# Altium PCB v1_pcb.PCBDOC
Units mil, origin at the board's own origin, x right, y up, seen from the top; angles counter-clockwise.
Board outline 3900 x 2500 mil, 2 copper layers (Top Layer, Bottom Layer); 55 components, 32 nets, 159 pads, 3 vias.
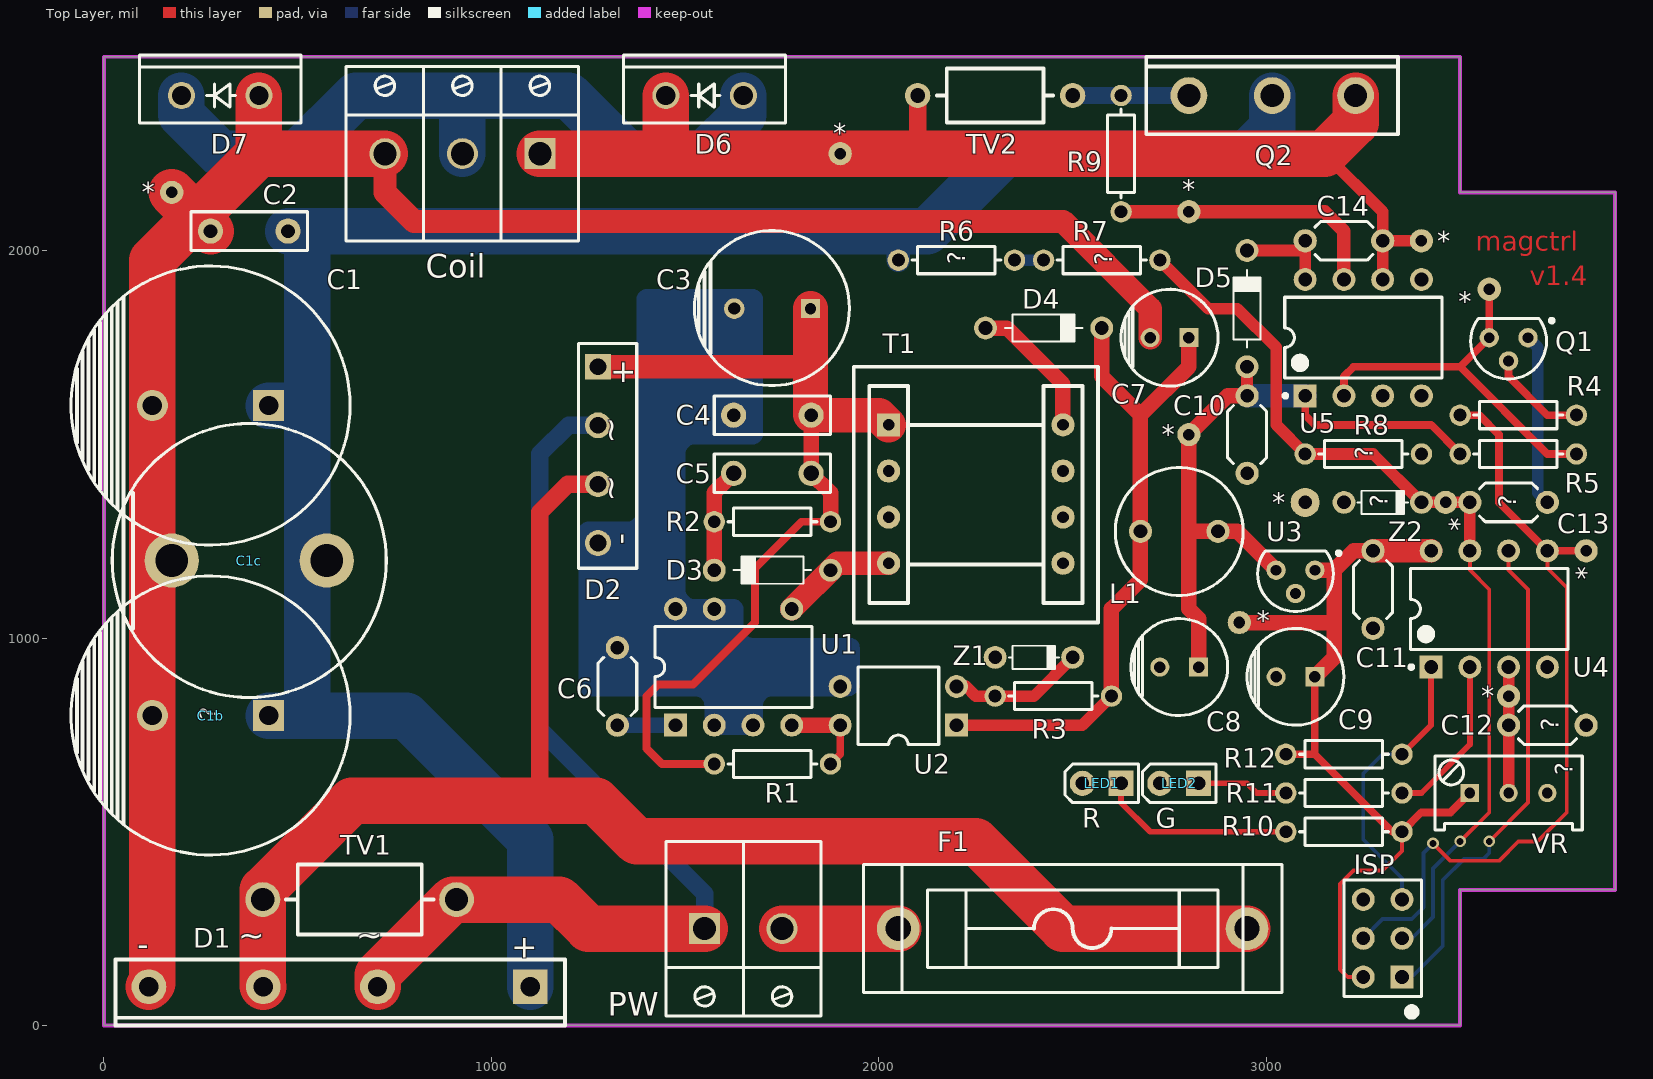
[diagram p0: Top Layer view]
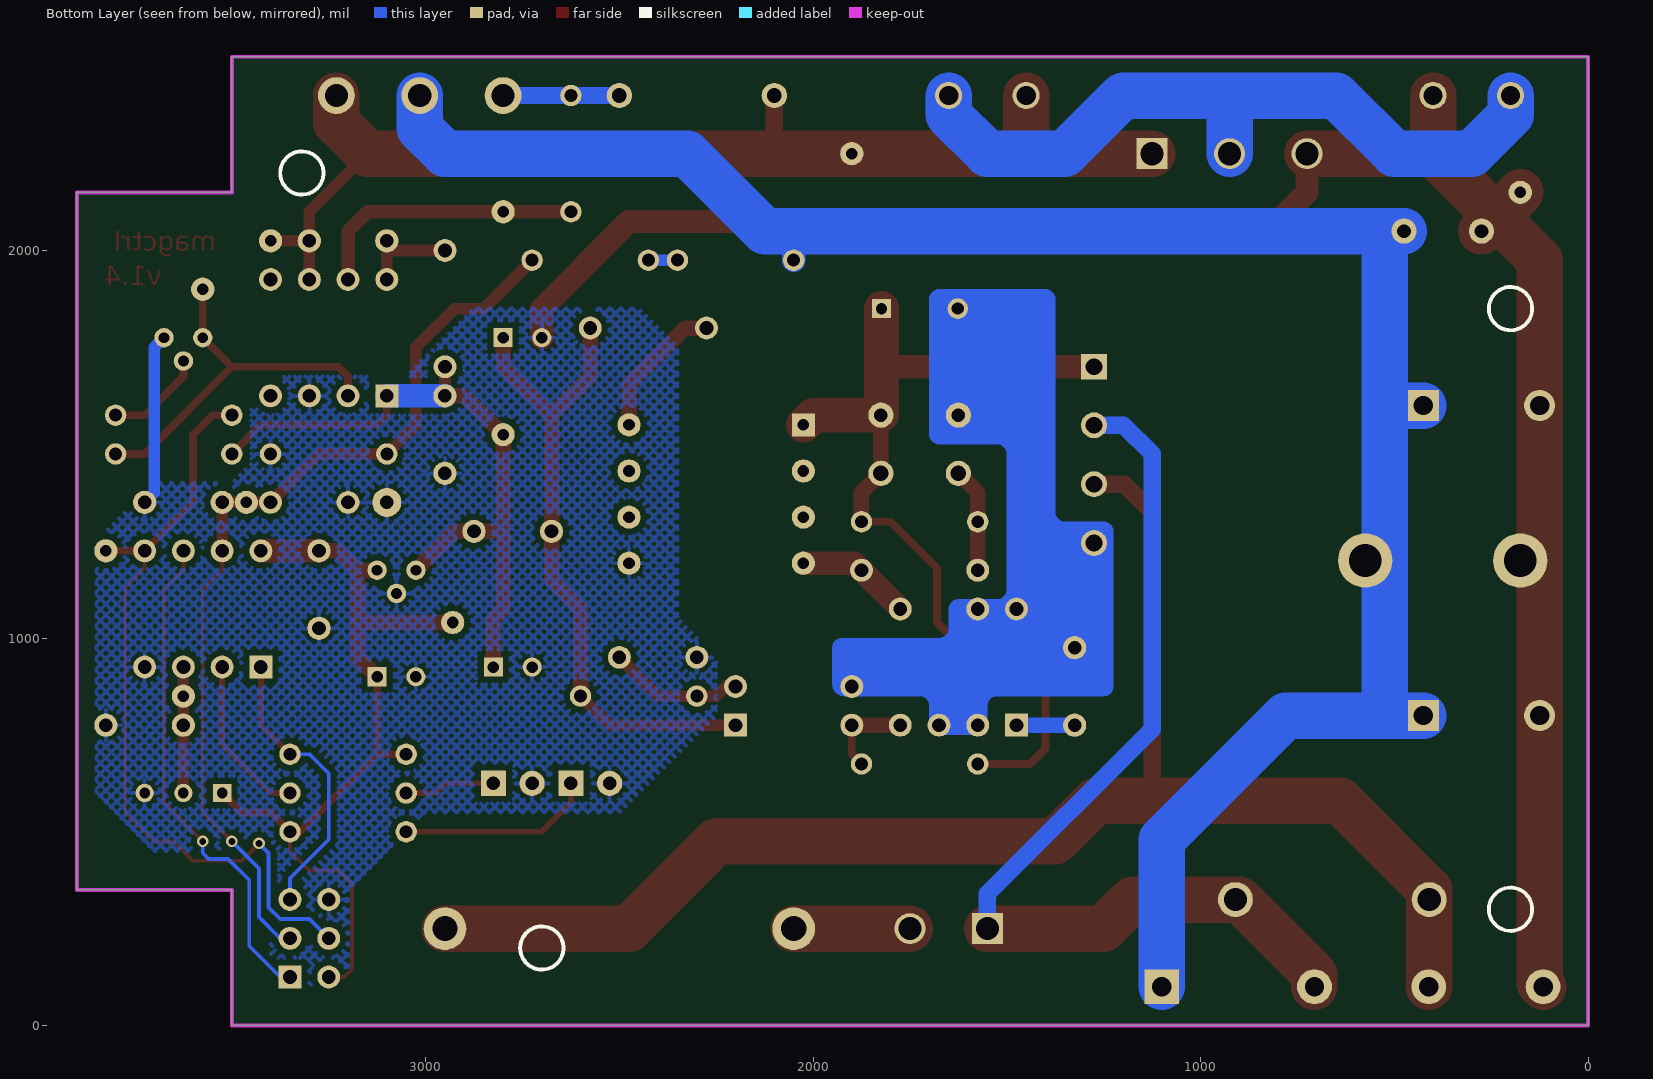
[diagram p1: Bottom Layer view, seen from below]

## Layer stack, top to bottom
Top Layer: signal copper 1.4
Dielectric: dielectric 12.6, FR-4, Dk 4.8
Bottom Layer: signal copper 1.4

## Board outline
0,0 0,2500 3500,2500 3500,2150 3900,2150 3900,350 3500,350 3500,0

## Design rules (kind name [scope] priority, off if disabled: settings)
Clearance Clearance_HV [(InNet('HV+') OR InNet('HV-') OR InNet('HVDC') OR InNet('PW+') OR InNet('PW-')) vs Not (OnLayer('Keep-Out Layer'))] p1: gap=30
Clearance Clearance_Overall [All] p2: gap=15
FabricationTestPointUsage TestPointUsage [All] p1: valid=0 allowmultiple=FALSE
FabricationTestpoint Testpoint [All] p1: side=3 testpointundercomponent=TRUE minsize=40 maxsize=100 preferedsize=60 minholesize=0 maxholesize=40 preferedholesize=32 testpointgrid=1 allowsidetop=TRUE allowsidebottom=TRUE usegrid=TRUE gridtolerance=0.01
Height [All] p1: minheight=0 maxheight=2000 prefheight=500
HoleSize [All] p1: absolutevalues=TRUE maxlimit=1000 minlimit=10 maxpercent=80.000 minpercent=20.000
PolygonConnect [All] p1: connectstyle=Relief reliefconductorwidth=10 reliefentries=4 polygonreliefangle="90 Angle" airgapwidth=10
RoomDefinition v1_control [InComponentClass('v1_control')] p1: confinementstyle=ConfineOut formatcopy=TRUE lockcomponents=FALSE outline 4106,150 4575,150 4575,625 4106,625
RoomDefinition v1_power [InComponentClass('v1_power')] p2: confinementstyle=ConfineOut formatcopy=TRUE lockcomponents=FALSE outline 4106,725 4575,725 4575,1200 4106,1200
RoutingVias [All] p1: holewidth=28 width=50 viastyle="Through Hole" minholewidth=20 minwidth=30 maxholewidth=50 maxwidth=80
SolderMaskExpansion [All] p1: expansion=4
Width [All] p1: maxlimit=150 minlimit=10 preferedwidth=25 minimp=50.000000 maximp=50.000000 favimp=50.000000
24 further rules are at their usual default settings.

## Classes and differential pairs
component class v1_control: C10 C11 C12 C13 C14 Coil Coil1 D5 D6 D7 ISP LED1 LED2 Q1 Q2 R4 R5 R6 R7 R8 R9 R10 R11 R12 TV2 U4 U5 VR Z2
component class v1_power: C1 C1b C1c C2 C3 C4 C5 C6 C7 C8 C9 C88 C? D1 D2 D3 D4 F1 L1 PW R1 R2 R3 T1 TV1 U1 U2 U3 Z1

## Components (designator, comment, footprint, x,y, rotation, side; value= is the part's Value field where it differs from the comment)
C1 "450V100uF" CAP_18X30 275,1600 r180 top
C1b "450V100uF" CAP_18X30 275,800 r180 top
C1c "450V100uF" CAP_10MM_STUB 375,1200 r180 top
C2 "1KV0.01uF" CAP7 375,2050 r180 top
C3 "450V10uF" CAP2 1725,1850 r180 top
C4 "1KV10nF" CAP7 1725,1575 r180 top
C5 "1KV2.2nF" CAP5 1725,1425 r0 top
C6 "100V0.1uF" CAP6 1325,875 r270 top
C7 "50V22uF" CAP3 2750,1775 r180 top
C8 "50V22uF" CAP3 2775,925 r180 top
C9 "50V22uF" CAP3 3075,900 r180 top
C10 "100V0.1uF" CAP6 2950,1525 r270 top
C11 "100V0.1uF" CAP6 3275,1125 r270 top
C12 "1nF" CAP6 3725,775 r0 top
C13 "1nF" CAP6 3625,1350 r0 top
C14 "100V0.1uF" CAP6 3200,2025 r0 top
Coil "Header 3" TERMINAL3_1 925,2250 r180 top
D1 "GBJ2510" GBJ2510 1100,100 r180 top
D2 "KBP310" KBP310 1275,1700 r270 top
D3 "FR107" DIO1 1725,1175 r180 top
D4 "FR107" DIO1 2425,1800 r0 top
D5 "FR107" DIO1 2950,1850 r90 top
D6 "DS130-12A" TO-220_2 1550,2400 r0 top
D7 "DS130-12A" TO-220_2 300,2400 r0 top
F1 "5A" FUSE 2050,250 r0 top
ISP "Header 3X2" HDR2X3 3350,125 r90 top
L1 "4.7uH" INDUCTOR 2775,1275 r0 top
LED1 "R" LED1R 2575,625 r180 top
LED2 "G" LED1G 2775,625 r180 top
PW "Header 2" TERMINAL2_1 1550,250 r0 top
Q1 "9013" TO-92D 3625,1775 r90 top
Q2 "17N80C3" TO-247 3015,2400 r0 top
R1 "2M" RES0.25W 1725,675 r180 top
R2 "100K" RES0.25W 1725,1300 r0 top
R3 "1K" RES0.25W 2450,850 r0 top
R4 "10K" RES0.25W 3650,1575 r180 top
R5 "10K" RES0.25W 3650,1475 r0 top
R6 "200K" RES0.25W 2200,1975 r0 top
R7 "200K" RES0.25W 2575,1975 r0 top
R8 "5K" RES0.25W 3250,1475 r0 top
R9 "10R" RES0.25W 2625,2250 r90 top
R10 "4.7K" RES0.25W 3200,500 r180 top
R11 "4.7K" RES0.25W 3200,600 r180 top
R12 "4.7K" RES0.25W 3200,700 r0 top
T1 "HFTrans" EE16 2025,1550 r0 top
TV1 "1.5KE440CA" TVS1 660,325 r0 top
TV2 "6P18CA" TVS2 2300,2400 r0 top
U1 "TNY266PN" TNY266PN 1475,775 r0 top
U2 "P521-1" DIP-4 2050,825 r90 top
U3 "78L05" TO-92D 3075,1175 r90 top
U4 "TINY13A" DIP-8 3575,1075 r90 top
U5 "IR2117S" DIP-8 3250,1775 r90 top
VR "RPot" 3296W 3625,600 r0 top
Z1 "12V" DIO2 2400,950 r0 top
Z2 "5V" DIO2 3300,1350 r0 top

## Footprints (in the part's own frame and the unit in brackets; to place one, negate y for a bottom-side part, rotate by r counter-clockwise, add the part's x,y. Pads: shape width x height; smd on the part's side, far side on the other; paste and mask are expansions set on the pad)
3296W [mm] "Thru-Hole; 3 Leads"
  rect 1.2x1.2 hole 0.7: 1(-2.54,0)
  round 1.2 hole 0.7: 2(0,0) 3(2.54,0)
  silkscreen extent -4.83,-2.41 4.83,2.41, body extent -4.83,-2.41 4.83,2.41, height 11.94
CAP2 [mm]
  rect 1.25x1.25 hole 0.75: 1(-2.5,0)
  round 1.35 hole 0.8: 2(2.5,0)
  silkscreen extent -5.05,-5.11 5.11,5.05, body extent -4.97,-5.01 5.03,4.98, height 14.1
CAP3 [mm] "Capacitor, Electrolytic, Radial; Body 5 x 6.8 mm (Dia.xH typ); Pin Spacing 2 mm (typ)"
  rect 1.25x1.25 hole 0.75: 1(-1.27,0)
  round 1.25 hole 0.75: 2(1.27,0)
  silkscreen extent -3.18,-3.17 3.17,3.17, body extent -3.18,-3.18 3.18,3.18, height 11.53
CAP5 [mm] "Capacitor, Ceramic, High Voltage"
  round 1.65 hole 1: 1(-2.54,0) 2(2.54,0)
  silkscreen extent -3.81,-1.27 3.81,1.27, body extent -4,-1.26 4,1.25, height 10.6
CAP6 [mil]
  round 60 hole 35: 1(-100,0) 2(100,0)
  silkscreen extent -75,-50 75,50, body extent -108,-50 108,48, height 257
CAP7 [mm]
  round 1.65 hole 0.889: 1(-2.54,0) 2(2.54,0)
  silkscreen extent -3.81,-1.27 3.81,1.27, body extent -4,-1.27 4,1.24, height 10.86
CAP_10MM_STUB [mil]
  round 140 hole 85: 1(-200,0) 2(200,0)
  silkscreen extent -354,-354 354,354, body extent -225,-25 225,25
CAP_18X30 [mil]
  rect 80x80 hole 50: 1(-150,0)
  round 80 hole 50: 2(150,0)
  silkscreen extent -360,-360 360,360, body extent -353,-354 356,354, height 1183
DIO1 [mm]
  round 1.5 hole 0.9: 1(-3.81,0) 2(3.81,0)
  silkscreen extent -2.54,-0.89 2.54,0.89, body extent -4.22,-1.33 4.19,1.33, height 3.06
DIO2 [mm]
  round 1.5 hole 0.9: 1(-2.54,0) 2(2.54,0)
  silkscreen extent -1.65,-0.76 1.65,0.76, body extent -2.74,-0.84 2.77,0.81, height 1.81
DIP-4 [mm] "DIP; 4 Leads; Row Spacing 7.62 mm; Pitch 2.54 mm"
  rect 1.5x1.5 hole 0.9: 1(-1.27,-3.81)
  round 1.5 hole 0.9: 2(1.27,-3.81) 3(1.27,3.81) 4(-1.27,3.81)
  silkscreen extent -2.55,-2.65 2.55,2.65, body extent -2.75,-3.94 2.79,4.06, height 5.58
DIP-8 [mm] "DIP; 8 Leads; Row Spacing 7.62 mm; Pitch 2.54 mm"
  rect 1.5x1.5 hole 0.9: 1(-3.81,3.81)
  round 1.5 hole 0.9: 2(-3.81,1.27) 3(-3.81,-1.27) 4(-3.81,-3.81) 5(3.81,-3.81) 6(3.81,-1.27) 7(3.81,1.27) 8(3.81,3.81)
  silkscreen extent -3.93,-5.15 2.65,5.23, body extent -3.93,-5.33 3.94,5.59, height 5.08
EE16 [mil]
  rect 60x60 hole 30: 1(0,0)
  round 60 hole 30: 2(0,-119) 3(0,-238) 4(0,-357) 5(450,-357) 6(450,-238) 7(450,-119) 8(450,0)
  silkscreen extent -90,-510 540,150, body extent -88,-527 538,170, height 707
FUSE [mil]
  round 110 hole 65: 1(0,0) 2(900,0)
  silkscreen extent -90,-165 990,165, body extent -100,-180 1000,175, height 575
GBJ2510 [mil] "SIP; 4 Leads; Body 15 x 17.5 x 6.8 mm (typ); Pitch 3.8 mm"
  rect 90x90 hole 50: 1(0,0)
  round 90 hole 50: 2(394,0) 3(689,0) 4(984,0)
  silkscreen extent -90,-70 1070,100, body extent -90,-75 1070,110, height 800
HDR2X3 [mm] "Connector; Header; 3x2 Position"
  rect 1.5x1.5 hole 0.9: 1(0,0)
  round 1.5 hole 0.9: 2(0,2.54) 3(2.54,0) 4(2.54,2.54) 5(5.08,0) 6(5.08,2.54)
  silkscreen extent -2.54,-1.27 6.35,3.81, body extent -1.27,-1.27 6.35,3.81, height 8.79
INDUCTOR [mil]
  round 60 hole 35: 1(-100,0) 2(100,0)
  silkscreen extent -165,-165 165,165, body extent -154,-155 154,152, height 400
KBP310 [mm]
  rect 1.7x1.7 hole 1.1: 1(0,0)
  round 1.7 hole 1.1: 2(3.835,0) 3(7.696,0) 4(11.557,0)
  silkscreen extent -1.52,-1.27 13.21,2.54, body extent -2.03,-1.62 13.97,2.38, height 13.54
LED1G [mm]
  rect 1.65x1.65 hole 0.889: 1(-1.27,0)
  round 1.65 hole 0.889: 2(1.27,0)
  silkscreen extent -2.41,-1.27 2.41,1.27, body extent -2,-2 1.52,2, height 6.72
LED1R [mm]
  rect 1.65x1.65 hole 0.889: 1(-1.27,0)
  round 1.65 hole 0.889: 2(1.27,0)
  silkscreen extent -2.41,-1.27 2.41,1.27, body extent -2,-2 1.52,2, height 6.72
RES0.25W [mm] "Resistor; 2 Leads"
  round 1.4 hole 0.85: 1(-3.81,0) 2(3.81,0)
  silkscreen extent -2.92,-0.89 2.92,0.89, body extent -4.06,-0.93 4.06,1.02, height 2.24
TERMINAL2_1 [mil] "Connector; Header; 2 Position"
  rect 80x80 hole 60: 1(0,0)
  round 80 hole 60: 2(200,0)
  silkscreen extent -100,-225 300,225, body extent -120,-237 320,235, height 433
TERMINAL3_1 [mil] "Connector; Header; 2 Position"
  rect 80x80 hole 60: 1(-200,0)
  round 80 hole 60: 2(0,0) 3(200,0)
  silkscreen extent -300,-225 300,225, body extent -320,-237 320,235, height 433
TNY266PN [mm] "DIP; 8 Leads; Row Spacing 7.62 mm; Pitch 2.54 mm"
  rect 1.5x1.5 hole 0.9: 1(0,0)
  round 1.5 hole 0.9: 2(2.54,0) 3(5.08,0) 4(7.62,0) 5(7.62,7.62) 7(2.54,7.62) 8(0,7.62)
  silkscreen extent -1.34,1.16 8.96,6.46, body extent -1.44,-0.19 9.06,7.81, height 3.81
TO-92D [mil]
  round 50 hole 28: 1(0,-50) 2(-60,0) 3(0,50)
  silkscreen extent -107,-116 50,98, body extent -94,-94 60,94, height 315
TO-220_2 [mil] "TO, Thru-Hole, Vertical, Heatsink Mounted; 3 In-Line Leads (1 Absent); Pitch 2.54 mm"
  round 70 hole 50: 1(100,0) 2(-100,0)
  silkscreen extent -209,-71 209,105, body extent -197,-67 197,110, height 830
TO-247 [mil]
  round 95 hole 60: 1(-215,0) 2(0,0) 3(215,0)
  silkscreen extent -325,-100 325,100, body extent -311,-94 311,115, height 1044
TVS1 [mil]
  round 90 hole 60: 1(-250,0) 2(250,0)
  silkscreen extent -190,-90 190,90, body extent -321,-104 321,104, height 254
TVS2 [mil]
  round 65 hole 38: 1(-200,0) 2(200,0)
  silkscreen extent -150,-70 150,70, body extent -267,-70 267,70, height 184

## Part data
C1 C1b C1c C3 C7 C8 C9: library part "Cap Pol2", "Polarized Capacitor (Axial)"
C2 C4 C5 C6 C10 C11 C12 C13 C14: library part Cap, "Capacitor"
Coil: "Header, 3-Pin"
D1 D2: "Single Phase Rectifier Bridge"
D3 D4 D5: library part Diode, "1 Amp Fast Recovery Rectifier"
D6 D7: library part Diode, "Diode"
F1: library part "Fuse 2", "Fuse"
ISP: "Header, 3-Pin, Dual row"
L1: library part Inductor, "Inductor"
LED1 LED2: library part LED, "LED"
PW: "Header, 2-Pin"
Q1: "NPN Bipolar Transistor"
Q2: "MOSFET N"
R1 R2 R3 R4 R5 R6 R7 R8 R9 R10 R11 R12: library part Res1, "Resistor"
T1: "Transformer"
TV1 TV2: library part TVS, "TVS Diode"
U1: "PI TinySwitch II"
U2: library part Optoisolator1, "4-Pin Phototransistor Optocoupler"
U3: "Positive Voltage Regulator"
U4: "AVR MCU"
U5: "MOSFET Driver"
VR: "Potentiometer"
Z1 Z2: library part "D Zener", "Zener Diode"

## Free pads (board coordinates)
  round 60 hole 30: 0(175,2150) 0(1900,2250) 0(2800,1525) 0(2800,2100) 0(2930,1040) 0(3400,2025) 0(3462.5,1350) 0(3575,1900) 0(3625,850) 0(3825,1225)
  round 75 hole 35: 0(3100,1350)

## Via types
v1: diameter 30, hole 18, Top Layer to Bottom Layer, 3 vias

## Nets (pads, with @x,y where several pads share a name; then routed paths per layer and width w, separated by ;. In a path a pad name is that pad's centre, name@x,y a point inside that pad or via, vN(x,y) a via of type N, cw(c..) or ccw(c..) an arc to the next point about the centre after c; other vN are vias at no path point)
5V: C9.1 C11.1 ISP.2 pad.0@2930,1040 R10.1 R12.1 U3.1 U4.8 VR.1 | length 2194.2
  Top Layer w10: ISP.2 3210,125 3190,145 3190,365 3225,400 3300,400 3350,450 R10.1
  Top Layer w20: R12.1 3125,700 ; C9.1 3125,700 ; VR.1 3475,550 3400,550 R10.1 3325,500 3125,700
  Top Layer w40: pad.0@2930,1040 3175,1040 ; C9.1 3175,950 3175,1040 ; U3.1 3175,1175 ; C11.1 3225,1225 3175,1175 ; 3175,1040 3175,1175
  Top Layer w60: C11.1 U4.8
13V: C8.1 C10.1 D5.1 L1.2 pad.0@2800,1525 R5.1 U3.3 U5.1 | length 1784.6
  Top Layer w20: U5.1 3100,1575 3125,1550 3425,1550 R5.1
  Top Layer w30: C10.1 D5.1
  Top Layer w40: 2800,1275 2925,1275 U3.3 ; C8.1 2825,1050 2800,1075 2800,1525 2900,1625 C10.1
  Bottom Layer w60: C10.1 U5.1
GND: C1.2 C1b.2 C1c.2 C2.2 C7.2 C8.2 C9.2 C10.2 C11.2 C12.2 C13.2 Coil.3 D1.4 D7.1 ISP.6 LED1.2 LED2.2 pad.0@175,2150 pad.0@3100,1350 Q1.1 R8.2 T1.5 U3.2 U4.4 U5.3 VR.3 Z1.1 Z2.1 | length 5654
  Top Layer w60: Coil.3 725,2150 800,2075 2475,2075 2700,1850 C7.2
  Top Layer w120: D1.4 125,109 C1b.2 C1c.2@125,1200 ; C1c.2 C1c.2@125,1200 ; pad.0@175,2150 237.5,2087.5 ; C2.2 237.5,2087.5 ; D7.1 400,2250 ; Coil.3 400,2250 ; C1c.2@125,1200 C1.2 125,1975 237.5,2087.5 ; 237.5,2087.5 400,2250
  Bottom Layer w30: Q1.1 3700,1750 3700,1375 C13.2
HV+: C3.1 C4.1 C5.2 D2.1 R1.2 R2.2 T1.1 | length 2400.4
  Top Layer w20: R1.2 1440,675 1400,715 1400,850 1430,880 1520,880 1680,1040 1680,1180 1800,1300 R2.2
  Top Layer w40: C4.1@1823.43,1576.57 ccw(c1825,1576.57) C4.1 C5.2 1875,1375 R2.2
  Top Layer w60: D2.1 1823.43,1700
  Top Layer w90: C4.1@1823.43,1576.57 1823.43,1700 C3.1 ; C4.1 2000,1575 T1.1
HV-: C3.2 C4.2 C6.1 D2.4 U1.2 U1.3 U1.7 U1.8 U2.3
HVDC: C1.1 C1b.1 C1c.1 C2.1 D1.1 Q2.2 R6.1 | length 5397.3
  Bottom Layer w60: R6.1 2050,2050
  Bottom Layer w120: C1b.1 525,800 ; C1.1 525,1600 ; C2.1 525,2050 ; C1c.1 C1c.1@525,1200 ; D1.1 1100,480 780,800 525,800 ; Q2.2 3015,2315 2950,2250 2325,2250 2125,2050 2050,2050 525,2050 ; 525,800 C1c.1@525,1200 ; C1c.1@525,1200 525,1600 ; 525,1600 525,2050
MISO: ISP.1 U4.6 | length 1299.3
  Top Layer w10: v1(3575,475) 3675,575 3675,1125 3625,1175 U4.6
  Bottom Layer w10: ISP.1 3375,125 3455,205 3455,375 3510,430 3560,430 3575,445 v1(3575,475)
MOSI: ISP.4 pad.0@3825,1225 R4.2 U4.5 | length 2047.1
  Top Layer w10: v1(3430,470) 3475,425 3600,425 3650,475 3700,475 3775,550 3775,1130 3725,1180 U4.5
  Top Layer w20: R4.2 3550,1575 3600,1525 3600,1350 U4.5 pad.0@3825,1225
  Bottom Layer w10: ISP.4 3300,275 3375,275 3405,305 3405,445 v1(3430,470)
NetC5_1: C5.1 D3.2 R2.1 | length 270.7
  Top Layer w40: D3.2 R2.1 1575,1375 C5.1
NetC6_2: C6.2 U1.1 | length 150
  Bottom Layer w40: C6.2 U1.1
NetC7_1: C7.1 D4.2 L1.1 R3.2 U2.1 | length 1705.3
  Top Layer w30: U2.1 2525,775 R3.2
  Top Layer w40: D4.2 2575,1675 2675,1575 ; R3.2 2600,1075 2675,1150 2675,1575 ; C7.1 2800,1700 2675,1575
NetC12_1: C12.1 pad.0@3625,850 U4.3 VR.2 | length 325
  Top Layer w30: VR.2 3625,800 U4.3
NetC14_1: C14.1 D5.2 U5.8 | length 250
  Top Layer w30: D5.2 C14.1@3100,2000 ; U5.8 C14.1@3100,2000 ; C14.1 C14.1@3100,2000
NetC14_2: C14.2 Coil.1 D6.2 pad.0@1900,2250 pad.0@3400,2025 Q2.3 TV2.1 U5.6 | length 2995.3
  Top Layer w30: 3150,2250 3300,2100 C14.2 ; U5.6 C14.2 ; pad.0@3400,2025 C14.2
  Top Layer w45: 2100,2250 TV2.1
  Top Layer w120: Coil.1 1450,2250 ; D6.2 1450,2250 ; Q2.3 3230,2330 3150,2250 1450,2250
NetCoil_2: Coil.2 D6.1 D7.2 | length 1907.1
  Bottom Layer w120: D7.2 200,2350 300,2250 500,2250 650,2400 925,2400 ; Coil.2 925,2400 ; D6.1 1650,2350 1550,2250 1350,2250 1200,2400 925,2400
NetD3_1: D3.1 T1.4 U1.5 | length 298.9
  Top Layer w60: U1.5 1893,1193 T1.4
NetD4_1: D4.1 T1.8 | length 365.1
  Top Layer w40: D4.1 2330,1800 2475,1655 T1.8
NetF1_1: F1.1 PW.2 | length 300
  Top Layer w120: PW.2 F1.1
NetLED1_1: LED1.1 R10.2 | length 506.1
  Top Layer w15: LED1.1 2625,575 2700,500 R10.2
NetLED2_1: LED2.1 R11.2 | length 235.4
  Top Layer w15: LED2.1 2950,625 2975,600 R11.2
NetQ1_2: Q1.2 R4.1 | length 256.4
  Top Layer w20: Q1.2 3625,1675 3725,1575 R4.1
NetQ1_3: pad.0@3575,1900 Q1.3 R5.2 U5.2 | length 984.6
  Top Layer w20: U5.2 3200,1675 3225,1700 3500,1700 ; pad.0@3575,1900 Q1.3 3500,1700 ; R5.2 3725,1475 3500,1700
NetQ2_1: Q2.1 R9.2 TV2.2 | length 300
  Bottom Layer w45: TV2.2 R9.2 Q2.1
NetR1_1: R1.1 U1.4 U2.4 | length 235.4
  Top Layer w20: R1.1 1900,700 U2.4
  Top Layer w40: U1.4 U2.4
NetR3_1: R3.1 U2.2 Z1.2 | length 351.8
  Top Layer w30: U2.2 2225,875 2250,850 R3.1 2400,850 Z1.2
NetR6_2: R6.2 R7.1 | length 75
  Bottom Layer w30: R6.2 R7.1
NetR9_1: pad.0@2800,2100 R9.1 U5.7 | length 720.7
  Top Layer w35: R9.1 3150,2100 3200,2050 U5.7
NetR11_1: R11.1 U4.2 | length 426.8
  Top Layer w15: R11.1 3400,600 3525,725 U4.2
PW+: D1.2 D2.2 PW.1 TV1.2 | length 2568.1
  Top Layer w120: D1.2 706,131 900,325 1175,325 1250,250 PW.1
  Bottom Layer w45: D2.2 1199,1549 1125,1475 1125,765 1550,340 PW.1
PW-: D1.3 D2.3 F1.2 TV1.1 | length 3947.2
  Top Layer w45: 1125,580 1125,1325 1197,1397 D2.3
  Top Layer w120: D1.3 410,101 410,350 640,580 1270,580 1375,475 2250,475 2475,250 F1.2
RST: ISP.5 R12.2 U4.1 | length 760.9
  Top Layer w15: R12.2 3425,775 U4.1
  Bottom Layer w10: ISP.5@3325,325 ISP.5@3337.5,337.5 ; ISP.5 3350,380 3250,480 3250,650 3300,700 R12.2
SCK: C13.1 ISP.3 pad.0@3462.5,1350 R7.2 R8.1 U4.7 Z2.2 | length 2429.6
  Top Layer w10: v1(3500,475) 3575,550 3575,1125 3525,1175 U4.7
  Top Layer w30: R7.2 2850,1850 2925,1850 3025,1750 3025,1550 R8.1 3275,1475 Z2.2 C13.1 U4.7
  Bottom Layer w10: ISP.3 3375,225 3430,280 3430,405 v1(3500,475)
pads on no net: T1.2 T1.3 T1.6 T1.7 U5.4 U5.5

## Polygon pours and split planes (outlines as drawn)
GND on Bottom Layer "Top Layer-No Net" (hatched 45Degree grid 20 track 10, remove dead copper, pour order 3): 2450,1850 2350,1750 2350,1050 2250,950 2250,800 2500,550 3000,550 3200,350 3200,150 3250,100 3350,100 3400,150 3400,300 3550,450 3700,450 3850,600 3850,1250 3700,1400 3500,1400 3450,1450 3450,1600 3375,1675 3050,1675 2875,1850

## Keep-outs
Keep-Out Layer:
  lines w10: 0,0 3500,0 3500,350 3900,350 3900,2150 3500,2150 3500,2500 0,2500 0,300 0,0

## Other copper
Top Layer:
  text "magctrl" at 3540,2000 h50
  text "v1.4" at 3680,1910 h50
Bottom Layer:
  region net HV-: 1400,1900 ccw(c1400,1875) 1375,1875 1375,1325 cw(c1350,1325) 1350,1300 1250,1300 ccw(c1250,1275) 1225,1275 1225,875 ccw(c1250,875) 1250,850 1525,850 cw(c1525,825) 1550,825 1550,775 ccw(c1575,775) 1575,750 1675,750 ccw(c1675,775) 1700,775 1700,825 cw(c1725,825) 1725,850 1920.67,850 ccw(c1920.67,879.33) 1950,879.33 1950,975 ccw(c1925,975) 1925,1000 1675,1000 cw(c1675,1025) 1650,1025 1650,1075 ccw(c1625,1075) 1625,1100 1525,1100 cw(c1525,1125) 1500,1125 1500,1475 cw(c1525,1475) 1525,1500 1675,1500 ccw(c1675,1525) 1700,1525 1700,1875 ccw(c1675,1875) 1675,1900

## Silkscreen, mask and mechanical layers (free items; w line width, h text height)
Top Overlay:
  text "*" at 1882,2278 h50
  text "*" at 2783,2132 h50
  text "*" at 98,2126 h50
  text "*" at 3441,2000 h50
  text "?" at 2223,1964 h45 r90
  text "?" at 2602,1962 h45 r90
  text "*" at 3530,1915 h50 r180
  text "*" at 2730,1500 h50
  text "?" at 3275,1461 h45 r90
  text "?" at 3313,1337 h45 r90
  text "?" at 3645,1336 h45 r90
  text "*" at 3015,1325 h50
  text "*" at 3450,1310 h50 r270
  text "*" at 3850,1150 h50 r90
  text "*" at 2975,1020 h50
  text "*" at 3555,825 h50
  text "?" at 292,789 h45 r90
  text "?" at 3755,761 h45 r90
  text "?" at 3790,646 h45 r90
Bottom Overlay:
  circle w10: c3319.1,2200 r55.9
  circle w10: c2700,200 r55.9
  circle w10: c200,300 r55.9
  circle w10: c200,1850 r55.9

## Text inside footprints (layer, text, board x,y; h text height)
D1: Top Overlay "-" at 115,225 h59.06 r180; Top Overlay "+" at 1120,225 h59.06 r180; Top Overlay "~" at 415,254.52 h59.06 r180; Top Overlay "~" at 720,254.52 h59.06 r180
D2: Top Overlay "+" at 1315,1720 h59.06 r270; Top Overlay "-" at 1315,1270 h59.06 r270; Top Overlay "~" at 1285,1420 h59.06 r270; Top Overlay "~" at 1285,1570 h59.06 r270